# EAGLE board 12VAttinyDischargeChecker-SingleModuleForPcb (EAGLE 8.5.2)
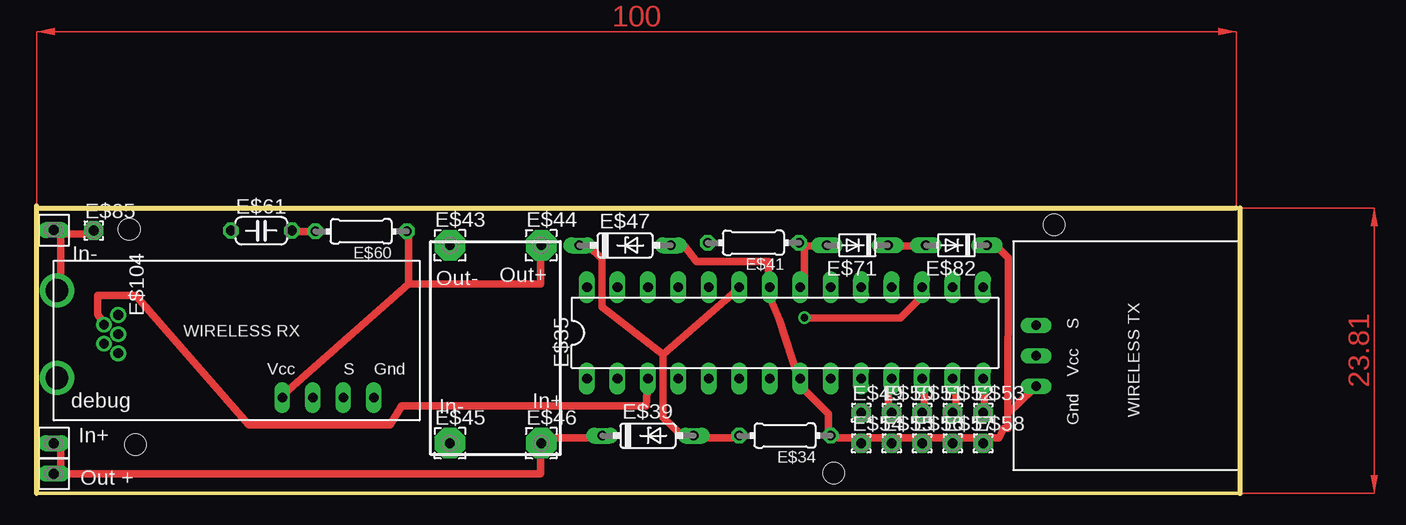
[diagram p0: board, top side]
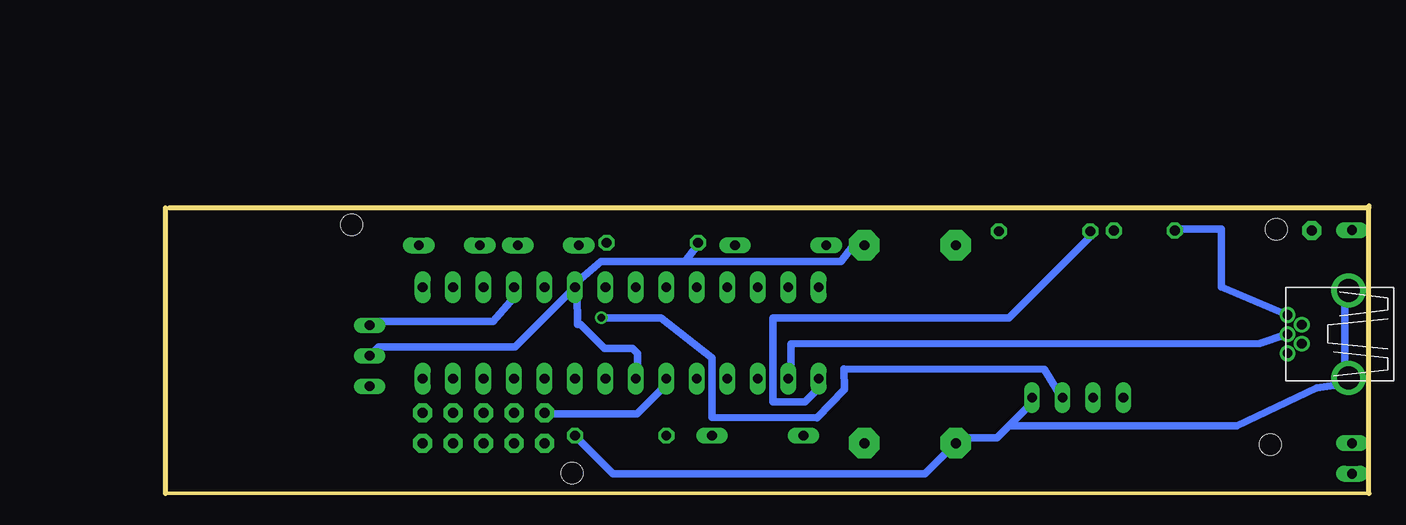
[diagram p1: board, bottom side, seen from below]

Size 100.33 x 23.96 mm. Coordinates in mm from the lower left corner, seen from the top.
Outline: 0,0 0,23.49 0,23.64
Outline: 100.33,0 100.33,23.49
Outline: 0,0 100.33,0
Outline: 0,0 0,23.81
Outline: 0,23.81 0,23.96
Outline: 0,23.81 100,23.81
Outline: 100.33,0 100.33,23.81
Copper layers (1*16): Top 0.035mm / dielectric 1.5mm / Bottom 0.035mm
Design rules "default": minimum track width 6mil, minimum drill 0.35mm, track to track 6mil, track to pad 6mil, pad to pad 6mil, via to via 6mil, smd to smd 6mil, copper to edge 40mil, drill to drill 6mil, minimum pad ring 10mil, minimum via ring 8mil, stop-mask expansion 4mil, vias tented up to drill 0mil, thermal gap 10mil
Holes 1.8 mm at 7.72,22.01 8.23,4.07 66.44,1.7 84.81,22.4

## Footprints (pad centres in the part's own frame; a part is rotated, then mirrored left to right if it is on the bottom)
0204/7 = drill 0.813 octagon: 1 -3.81,0; 2 3.81,0
DIL28-3 = drill 0.813 long: 1 -16.51,-3.81; 2 -13.97,-3.81; 3 -11.43,-3.81; 4 -8.89,-3.81; 5 -6.35,-3.81; 6 -3.81,-3.81; 7 -1.27,-3.81; 8 1.27,-3.81; 9 3.81,-3.81; 10 6.35,-3.81; 11 8.89,-3.81; 12 11.43,-3.81; 13 13.97,-3.81; 14 16.51,-3.81; 15 16.51,3.81; 16 13.97,3.81; 17 11.43,3.81; 18 8.89,3.81; 19 6.35,3.81; 20 3.81,3.81; 21 1.27,3.81; 22 -1.27,3.81; 23 -3.81,3.81; 24 -6.35,3.81; 25 -8.89,3.81; 26 -11.43,3.81; 27 -13.97,3.81; 28 -16.51,3.81
WIRELESS-TX-FLAT = drill 0.8 long: P$1 0.635,-6.35; P$2 -1.905,-6.35; P$3 3.175,-6.35
FE01-1 = drill 0.813 long: 1 -1.27,0
DO35Z7 = drill 0.813 long: A 3.81,0; C -3.81,0
WIRELESS-RX-FLAT = drill 0.8 long: P$1 3.81,-6.985; P$2 6.35,-6.985; P$3 8.89,-6.985; P$4 11.43,-6.985
2,54/0,8 = drill 0.813 pad 2.54 octagon: 1 0,0
1,6/0,8 = drill 0.813 pad 1.6 octagon: 1 0,0
C050-024X044 = drill 0.813 octagon: 1 -2.54,0; 2 2.54,0
DO34-5 = drill 0.813 long: A 2.54,0; C -2.54,0
USB-MB-H = drill 0.8: D+ 5.1,0; D- 3.9,0.8; GND 5.1,-1.6; ID 3.9,-0.8; VBUS 5.1,1.6 | drill 1.9: P$6 0,-3.65; P$7 0,3.65

## Placement (x,y rotation side)
E$34  220  [0204/7]  62.38,4.81 180 top
E$35  [DIL28-3]  62.38,13.38 0 top
E$36  [WIRELESS-TX-FLAT]  89.66,12.11 270 top
E$37  [FE01-1]  1.42,2.91 90 top
E$38  [FE01-1]  1.42,2.91 270 top
E$39  Zener 12v  [DO35Z7]  50.95,4.81 0 top
E$40  [WIRELESS-RX-FLAT]  16.66,14.97 0 top
E$41  220  [0204/7]  59.75,20.9 180 top
E$42  [FE01-1]  1.42,23.23 90 top
E$43  [2,54/0,8]  34.44,20.69 0 top
E$44  [2,54/0,8]  42.06,20.69 0 top
E$45  [2,54/0,8]  34.44,4.18 0 top
E$46  [2,54/0,8]  42.06,4.18 0 top
E$47  Zener 5v  [DO35Z7]  49.05,20.69 0 top
E$49  [1,6/0,8]  68.73,6.72 0 top
E$50  [1,6/0,8]  71.27,6.72 0 top
E$51  [1,6/0,8]  73.81,6.72 0 top
E$52  [1,6/0,8]  76.35,6.72 0 top
E$53  [1,6/0,8]  78.89,6.72 0 top
E$54  [1,6/0,8]  68.73,4.18 0 top
E$55  [1,6/0,8]  71.27,4.18 0 top
E$56  [1,6/0,8]  73.81,4.18 0 top
E$57  [1,6/0,8]  76.35,4.18 0 top
E$58  [1,6/0,8]  78.89,4.18 0 top
E$60  10k  [0204/7]  27.05,21.85 180 top
E$61  104  [C050-024X044]  18.73,21.91 0 top
E$71  [DO34-5]  68.42,20.69 180 top
E$82  [DO34-5]  76.67,20.69 180 top
E$85  [1,6/0,8]  4.76,21.91 0 top
E$104  [USB-MB-H]  1.7,13.27 0 top

## Library data of the parts
E$34 E$41 E$60 = eagle-ltspice
E$35 = 74xx-us
E$36 E$40 = LSGPackages
E$37 E$38 E$42 = con-lsta2
E$39 E$47 = ref-packages
E$43-E$46 E$49-E$58 E$85 = wirepad
E$61 = resistor
E$71 E$82 = diode
E$104 = con-usb-3

## Nets
S$1: E$61.1 E$104.VBUS
S$20: E$35.7 E$35.20 E$36.P$1 E$40.P$1 E$41.2 E$44.1 E$60.1
S$21: E$37.1 E$38.1 E$39.C E$46.1
S$22: E$34.2 E$35.23 E$39.A E$47.C
S$23: E$34.1 E$35.8 E$35.22 E$36.P$3 E$40.P$4 E$42.1 E$45.1 E$47.A E$54.1 E$55.1 E$56.1 E$57.1 E$58.1 E$82.C E$85.1 E$104.P$7
S$24: E$35.18 E$36.P$2
S$25: E$35.21 E$41.1 E$71.A
S$26: E$35.1 E$60.2 E$61.2
S$27: E$35.14 E$53.1
S$28: E$35.13 E$52.1
S$29: E$35.12 E$51.1
S$30: E$35.11 E$50.1
S$31: E$35.10
S$32: E$35.3 E$104.D-
S$33: E$35.2 E$104.D+
S$37: E$71.C E$82.A
S$38: E$35.17 E$40.P$3
S$47: E$35.6 E$49.1

## Tracks (layer width: path | path; a pad name or v marks a point on that pad's centre or on a via)
S$1
  Bottom 0.152: 16.06,22.04 E$61.1
  Bottom 0.61: E$104.VBUS 12.32,17.21 12.32,22.04 16.06,22.04
S$20
  Top 0.61: 31,17.44 21,8.64 E$40.P$1 | 31,17.44 31,21.64 E$60.1 | 31,17.44 42,17.44 42,20.64 E$44.1
  Bottom 0.61: E$35.20 66,16.64 66,14.1 65.73,14.1 63.72,12.09 61.39,12.09 60.98,11.68 61,9.64 E$35.7 | 57,19.33 56,20.64 E$41.2 | 57,19.33 64,19.33 66,17.64 E$35.20 | 57,19.33 44,19.33 43,20.64 E$44.1 | E$35.20 71.17,12.22 82.57,12.22 E$36.P$1
S$21
  Top 0.61: 2,1.64 2,3.64 E$38.1 | 2,1.64 42,1.64 42,3.64 E$46.1 43,4.64 47,4.64 E$39.C 48,4.64 | 2,1.64 E$37.1
S$22
  Top 0.61: 52.2,11.6 47.15,15.53 47.15,19.53 46,20.64 E$47.C | 52.2,11.6 52.2,6.33 54,4.64 E$39.A 55,4.64 58,4.64 E$34.2 | 52.2,11.6 58,16.64 E$35.23
S$23
  Top 0.508: 66,4.64 E$34.1
  Top 0.61: 74,4.64 76,4.64 E$57.1 77,4.64 79,4.64 | 79,4.64 80.21,4.64 80.65,5.4 80.96,5.4 80.96,6.67 | 80.96,6.67 83,8.64 E$36.P$3 | 80.96,6.67 81,19.64 80,20.64 E$82.C | 79,4.64 E$58.1 | 69,4.64 66,4.64 66,6.64 64,8.64 E$35.8 63.46,9.73 61.91,14.48 61,16.64 E$35.22 61,17.64 61,19.33 55,19.33 54,20.64 53,20.64 E$47.A | 69,4.64 71,4.64 | 69,4.64 E$54.1 | 71,4.64 74,4.64 | 74,4.64 E$56.1 | 71,4.64 E$55.1 | 2,21.64 4,21.64 E$85.1 | 2,21.64 2,17.64 E$104.P$7 | 2,21.64 E$42.1
  Bottom 0.61: 30,5.64 31,4.64 34,4.64 E$45.1 35,3.64 37,1.64 63,1.64 66,4.64 E$34.1 | 30,5.64 28,7.64 E$40.P$4 | 30,5.64 11,5.64 4.37,8.79 2,9.1 2,16.64 E$104.P$7
S$24
  Bottom 0.61: E$36.P$2 83,14.33 73,14.33 71,16.64 E$35.18
S$25
  Top 0.61: 64,20.64 65,20.64 E$71.A | 64,20.64 64,17.64 E$35.21 | 64,20.64 E$41.1
S$26
  Top 0.61: E$60.2 23.28,21.82 21.28,21.82 E$61.2
  Bottom 0.61: E$35.1 46,8.64 47,7.64 49.68,7.64 49.68,14.64 30,14.64 23,21.64 E$60.2
S$27
  Top 0.61: E$35.14 79,8.64 79,6.64 E$53.1
S$28
  Top 0.61: E$35.13 76.62,8.69 76.62,6.69 E$52.1
S$29
  Top 0.61: E$35.12 74,8.64 74,6.64 E$51.1
S$30
  Top 0.61: E$35.11 71,8.64 71,6.64 E$50.1
S$32
  Top 0.61: E$35.3 50.8,7.3 30.41,7.3 29.45,5.71 17.67,5.71 8.26,16.51 5.08,16.51 5.08,14.92 5.5,14.29 E$104.D-
S$33
  Bottom 0.61: E$104.D+ 6.9,13.26 9.12,12.51 48.18,12.44 48.18,9.44 arc154 E$35.2
S$37
  Top 0.61: E$71.C 71,20.64 74,20.64 E$82.A
S$38  (via drill 0.61)
  Top 0.61: v64,14.64 72,14.64 74,16.64 E$35.17
  Bottom 0.61: v64,14.64 59,14.64 54.78,11.27 54.77,6.35 46,6.31 43.75,8.69 43.79,10.35 27.04,10.31 26,8.64 E$40.P$3
S$47
  Bottom 0.61: E$35.6 59,8.64 61,6.64 68,6.64 E$49.1
(copper drawn outside any net)
  shapes: Top area x2

## Text on the board
tPlace: In- | Out- | Out+ | debug | In- | In+ | In+ | Out +